# EAGLE board AeroQuad (EAGLE 5.06)

Size 107.95 x 53.34 mm. Coordinates in mm from the lower left corner, seen from the top.
Outline: 0,26.67 107.95,26.67
Outline: 5.08,53.34 102.87,53.34 104.14,52.07 104.14,0 5.08,0 5.08,53.34
Copper layers (1*16): Top 0.035mm / dielectric 1.5mm / Bottom 0.035mm
Design rules "default *": minimum track width 8mil, minimum drill 16mil, track to track 8mil, track to pad 8mil, pad to pad 8mil, via to via 10mil, smd to smd 8mil, copper to edge 40mil, drill to drill 12mil, minimum pad ring 10mil, minimum via ring 10mil, stop-mask expansion 4mil, vias tented up to drill 0mil, thermal gap 10mil
Net classes: 0 default: width 0.203 mm, drill 0.406 mm, clearance 0.203 mm; 1 power: width 0.61 mm, drill 0.711 mm, clearance 0.203 mm; 2 gnd: width 0.305 mm, drill 0.711 mm, clearance 0.203 mm; 3 usbvcc: width 0.508 mm, drill 0.711 mm, clearance 0.203 mm
Holes 3.2 mm at 101.6,2.54 20.32,50.8 95.25,50.8 20.32,2.54

## Footprints (pad centres in the part's own frame; a part is rotated, then mirrored left to right if it is on the bottom)
1X03_LOCK = drill 1.016 pad 1.88 round: 1 0,0.127; 2 2.54,-0.127; 3 5.08,0.127
1X04_LOCK = drill 1.016 pad 1.88 square: 1 0,0.127 | drill 1.016 pad 1.88 round: 2 2.54,-0.127; 3 5.08,0.127; 4 7.62,-0.127
2X08 = drill 1.016 octagon: 1 -8.89,-1.27; 2 -8.89,1.27; 3 -6.35,-1.27; 4 -6.35,1.27; 5 -3.81,-1.27; 6 -3.81,1.27; 7 -1.27,-1.27; 8 -1.27,1.27; 9 1.27,-1.27; 10 1.27,1.27; 11 3.81,-1.27; 12 3.81,1.27; 13 6.35,-1.27; 14 6.35,1.27; 15 8.89,-1.27; 16 8.89,1.27
1X09_LOCK = drill 1.016 pad 1.88 round: 1 0,0.127; 2 2.54,-0.127; 3 5.08,0.127; 4 7.62,-0.127; 5 10.16,0.127; 6 12.7,-0.127; 7 15.24,0.127; 8 17.78,-0.127; 9 20.32,0.127
1X01 = drill 1.016 octagon: 1 0,0
1X04 = drill 1.016 pad 1.88 square: 1 0,0 | drill 1.016 pad 1.88 round: 2 2.54,0; 3 5.08,0; 4 7.62,0
1X08_LOCK = drill 1.016 pad 1.88 square: 1 0,0.127 | drill 1.016 pad 1.88 round: 2 2.54,-0.127; 3 5.08,0.127; 4 7.62,-0.127; 5 10.16,0.127; 6 12.7,-0.127; 7 15.24,0.127; 8 17.78,-0.127
1X06_LOCK = drill 1.016 pad 1.88 round: 1 0,0; 2 2.54,-0.254; 3 5.08,0; 4 7.62,-0.254; 5 10.16,0; 6 12.7,-0.254
LED3MM = drill 0.813 pad 1.88 round: A -1.27,0; K 1.27,0
AXIAL-0.3 = drill 0.9 pad 1.88 round: P$1 -3.81,0; P$2 3.81,0
TACTILE-PTH = drill 1.016 round: 1 -3.251,2.261; 2 3.251,2.261; 3 -3.251,-2.261; 4 3.251,-2.261
1X10_LOCK = drill 1.016 pad 1.88 round: 1 0,0.127; 2 2.54,-0.127; 3 5.08,0.127; 4 7.62,-0.127; 5 10.16,0.127; 6 12.7,-0.127; 7 15.24,0.127; 8 17.78,-0.127; 9 20.32,0.127; 10 22.86,-0.127

## Placement (x,y rotation side)
BACKMOTOR  [1X03_LOCK]  11.43,26.67 0 top
CAMERAX  [1X03_LOCK]  11.43,17.78 0 top
CAMERAY  [1X03_LOCK]  11.43,15.24 0 top
COMPASS  [1X04_LOCK]  53.34,30.48 0 top
DIGH  [2X08]  100.33,19.05 90 top
DIGL  [2X08]  100.33,39.37 90 top
FRONTMOTOR  [1X03_LOCK]  11.43,29.21 0 top
GPS  [1X04_LOCK]  53.34,7.62 90 top
IDG500  [1X09_LOCK]  72.39,36.83 270 top
IMU5DOF  [1X09_LOCK]  93.98,36.83 270 top
JP3  [1X01]  99.06,50.8 0 top
JP4  [1X01]  101.6,50.8 0 top
JP5  [1X01]  99.06,7.62 0 top
JP6  [1X01]  101.6,7.62 0 top
JP7  [1X03_LOCK]  53.34,40.64 90 top
JP8  [1X03_LOCK]  55.88,40.64 90 top
JP9  [1X03_LOCK]  58.42,40.64 90 top
JP10  [1X03_LOCK]  60.96,40.64 90 top
JP11  [1X03_LOCK]  63.5,40.64 90 top
JP12  [1X03_LOCK]  66.04,40.64 90 top
JP19  [1X04]  77.47,22.86 90 top
JP20  [1X03_LOCK]  78.74,11.43 270 top
JP23  [1X08_LOCK]  73.66,50.8 0 top
JP24  [1X08_LOCK]  78.74,2.54 0 top
JP25  [1X08_LOCK]  55.88,2.54 0 top
JP26  [1X06_LOCK]  38.1,2.54 0 top
LEFTMOTOR  [1X03_LOCK]  11.43,24.13 0 top
POWERLED  [LED3MM]  82.55,46.35 180 top
PROX  [1X03_LOCK]  86.36,11.43 270 top
PROX1  [1X03_LOCK]  93.98,11.43 270 top
PWM1  [1X08_LOCK]  50.8,50.8 0 top
PWM2  [1X08_LOCK]  29.21,50.8 0 top
R1  4.7k  [AXIAL-0.3]  12.7,48.26 0 top
R2  330  [AXIAL-0.3]  73.79,43.43 0 top
R3  330  [AXIAL-0.3]  73.66,46.99 0 top
RIGHTMOTOR  [1X03_LOCK]  11.43,21.59 0 top
S1  SWITCH-MOMENTARY-2PTH  [TACTILE-PTH]  92.71,44.45 270 top
STATUSLED  [LED3MM]  82.55,41.78 180 top
XBEE  [1X10_LOCK]  22.86,41.91 0 top

## Library data of the parts
BACKMOTOR CAMERAX CAMERAY COMPASS FRONTMOTOR GPS IDG500 IMU5DOF JP7-JP12 JP19 JP20 JP23-JP26 LEFTMOTOR POWERLED PROX PROX1 PWM1 PWM2 R1-R3 RIGHTMOTOR S1 STATUSLED XBEE = SparkFun
DIGH DIGL JP3-JP6 = pinhead

## Nets
3.3V: COMPASS.2
5.0V: GPS.2
5VBEC: BACKMOTOR.2 CAMERAX.2 CAMERAY.2 FRONTMOTOR.2 LEFTMOTOR.2 RIGHTMOTOR.2
AREF: PWM2.1
GND [gnd]: BACKMOTOR.1 CAMERAX.1 CAMERAY.1 COMPASS.1 FRONTMOTOR.1 GPS.1 IDG500.9 IMU5DOF.8 JP5.1 JP6.1 JP7.1 JP8.1 JP9.1 JP10.1 JP11.1 JP12.1 JP20.3 JP26.2 JP26.3 LEFTMOTOR.1 PROX1.3 PROX.3 PWM2.2 R2.P$1 R3.P$1 RIGHTMOTOR.1 S1.3 XBEE.7
N$2: IDG500.8
N$3: POWERLED.K R3.P$2
N$4: JP26.6 S1.1
N$5: JP24.5
N$6: JP20.1 JP24.4
N$7: JP24.2 PROX.1
N$8: IDG500.3 JP24.1
N$9: JP19.4 JP25.8
N$10: JP19.3 JP25.7
N$11: IDG500.2 JP25.6
N$12: IMU5DOF.6 JP25.5
N$13: IMU5DOF.7 JP25.4
N$14: IMU5DOF.3 JP25.3
N$15: IMU5DOF.2 JP25.2
N$16: IMU5DOF.1 JP25.1
N$17: STATUSLED.A
N$20: GPS.3
N$21: GPS.4
N$23: CAMERAX.3
N$24: CAMERAY.3
N$25: FRONTMOTOR.3
N$27: BACKMOTOR.3
N$28: LEFTMOTOR.3
N$29: RIGHTMOTOR.3
N$41: JP10.3
N$42: JP7.3
N$43: JP8.3
N$51: IDG500.1 IMU5DOF.9 JP26.5 PROX1.2 PROX.2 R1.P$1
N$52: JP23.5 XBEE.4
N$61: JP9.3
N$62: R1.P$2
N$63: R2.P$2 STATUSLED.K
N$70: JP23.3
N$73: JP23.4
N$74: JP24.3 PROX1.1
N$75: JP23.6 XBEE.3
N$76: JP23.7
N$77: JP23.8
PWM2: PWM1.6
PWM3: PWM1.5
PWM4: PWM1.4
PWM5: PWM1.3
PWM6: PWM1.2
PWM7: PWM1.1
PWM8: PWM2.8
PWM9: PWM2.7
PWM10: PWM2.6
PWM11: PWM2.5
PWM12: PWM2.4
PWM13: PWM2.3
RX0: PWM1.8
SCL: COMPASS.4
SDA: COMPASS.3
TX0: PWM1.7
VCC [power]: JP3.1 JP4.1 JP7.2 JP8.2 JP9.2 JP10.2 JP11.2 JP12.2 JP26.4 POWERLED.A XBEE.5

## Tracks (layer width: path | path; a pad name or v marks a point on that pad's centre or on a via)
5VBEC  (5 unrouted)
GND  (27 unrouted)
N$3  (1 unrouted)
N$4  (1 unrouted)
N$6  (1 unrouted)
N$7  (1 unrouted)
N$8  (1 unrouted)
N$9  (1 unrouted)
N$10  (1 unrouted)
N$11  (1 unrouted)
N$12  (1 unrouted)
N$13  (1 unrouted)
N$14  (1 unrouted)
N$15  (1 unrouted)
N$16  (1 unrouted)
N$51  (5 unrouted)
N$52  (1 unrouted)
N$63  (1 unrouted)
N$74  (1 unrouted)
N$75  (1 unrouted)
VCC  (10 unrouted)

## Text on the board
tPlace: Xbee | S | + | Reset | - | IMU | 1 | 2 | 3 | 4 | 5 | 6 | 3.3V | X-A | Z-R | Y-A | Motors | Compass | - | + | S | Z-R 4.5 | Z-A | X-R 4.5 | F | GND | 3.3V | SDA | SCL | Y-R 4.5 | B | L | Y-R | AZ | R | X-R | AZ | GND | X | GND | 3.3V | Y | - | + | S | Camera | 5.0V | GND | AeroQuad Mega Shield v1.1 | GPS | Power | Prox 1 | Prox 2